# EAGLE board Main (EAGLE 7.2.0)
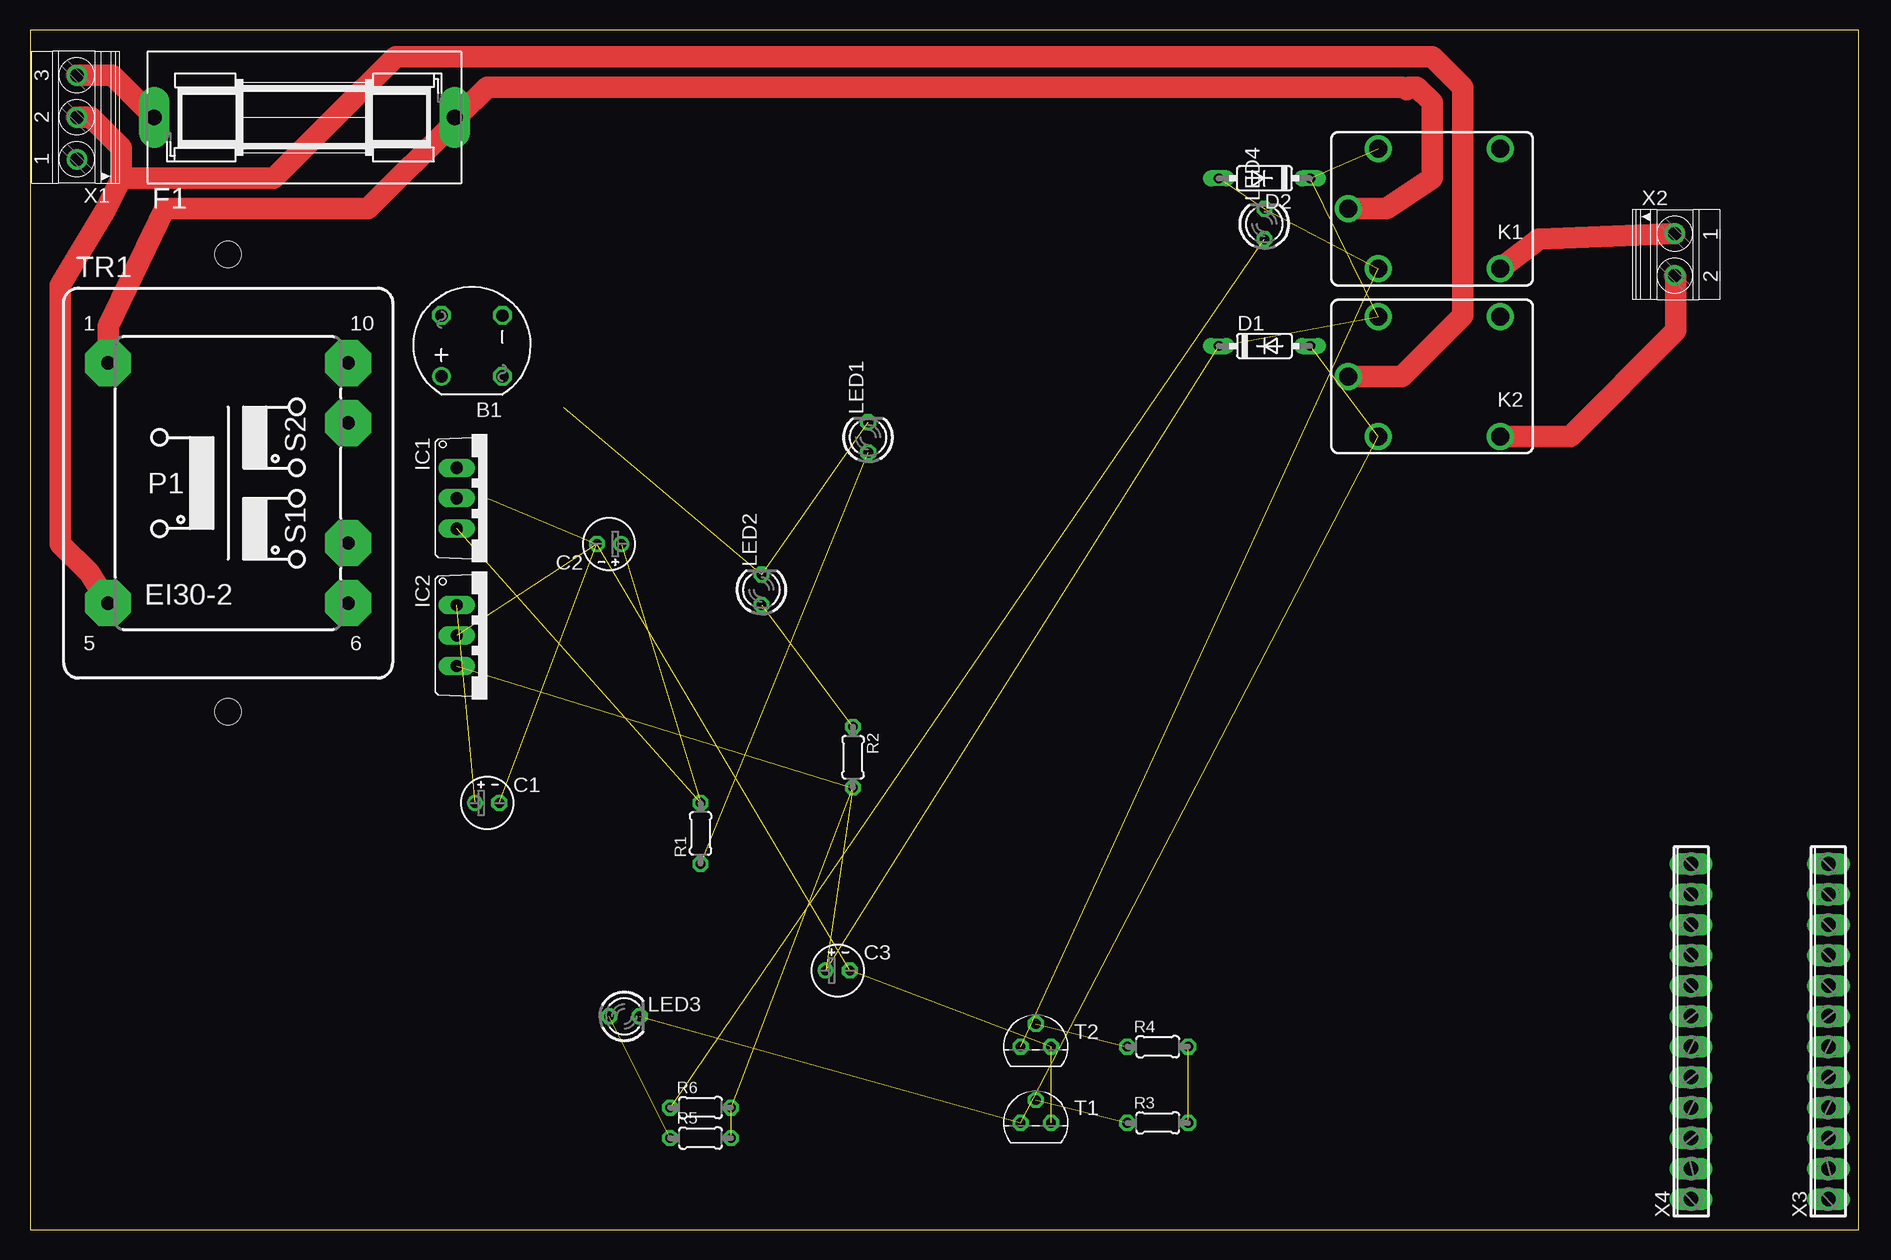
[diagram p0: board, top side]
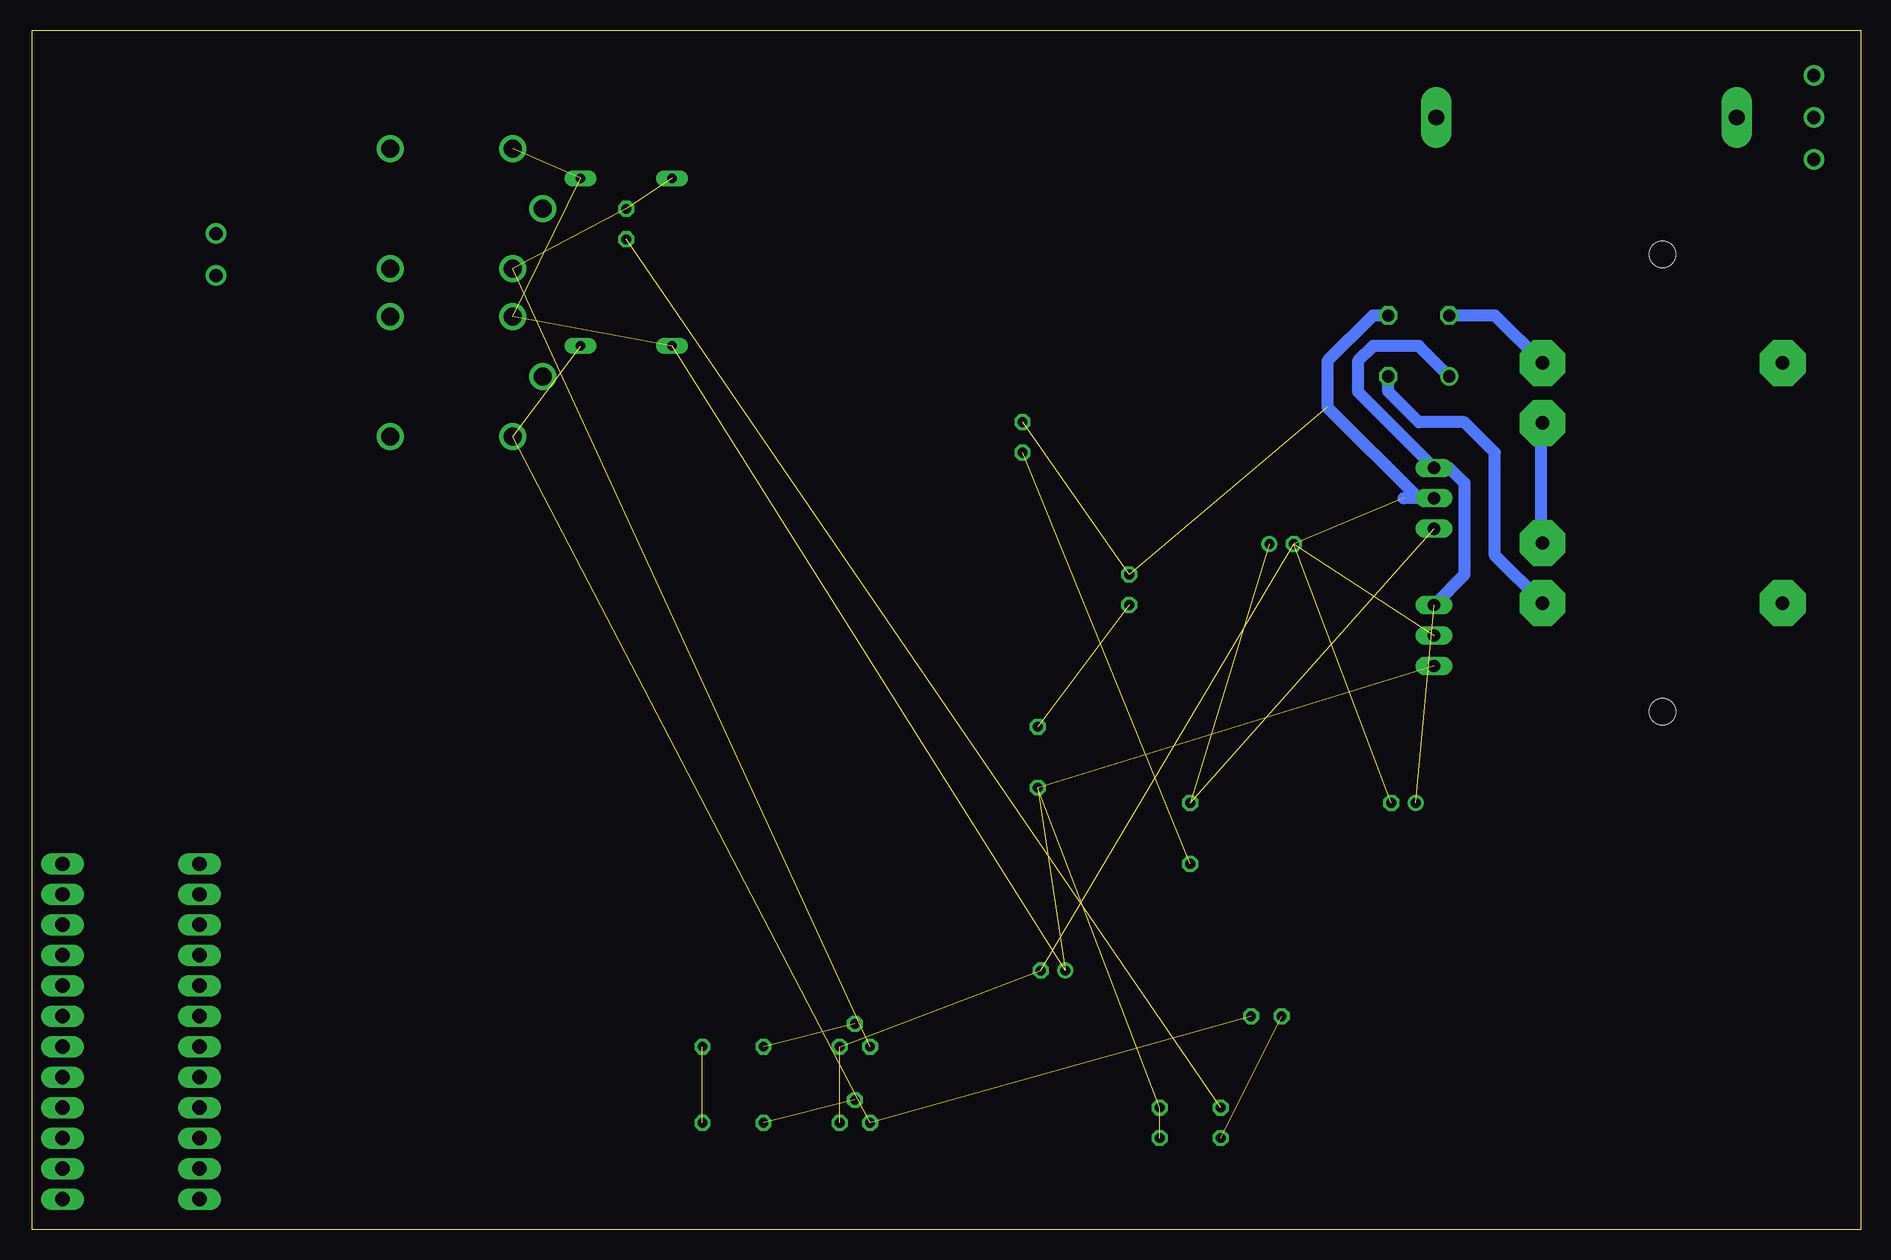
[diagram p1: board, bottom side, seen from below]

Size 152.38 x 100 mm. Coordinates in mm from the lower left corner, seen from the top.
Outline: 0,0 152.38,0 152.38,100 0,100 0,0
Copper layers (1*16): Top 0.035mm / dielectric 1.5mm / Bottom 0.035mm
Design rules "default": minimum track width 10mil, minimum drill 24mil, track to track 8mil, track to pad 8mil, pad to pad 8mil, via to via 8mil, smd to smd 8mil, copper to edge 40mil, drill to drill 8mil, minimum pad ring 10mil, minimum via ring 8mil, stop-mask expansion 4mil, vias tented up to drill 0mil, thermal gap 10mil
Holes 2.2 mm at 16.51,81.28 16.51,43.18

## Footprints (pad centres in the part's own frame; a part is rotated, then mirrored left to right if it is on the bottom)
RB1A = drill 1.016: + -2.54,2.54 | drill 1.016 octagon: - 2.54,-2.54; AC1 2.54,2.54; AC2 -2.54,-2.54
E2-4 = drill 0.813 pad 1.27: + -1.016,0 | drill 0.813 pad 1.27 octagon: - 1.016,0
DO35-7 = drill 0.813 long: A 3.81,0; C -3.81,0
SH25 = drill 1.321 pad 2.54 long: 1 -12.522,0; 2 12.522,0
TO220V = drill 1.016 long: 1 -2.54,-2.54; 2 0,-2.54; 3 2.54,-2.54
CQ1 = drill 1.5: 1 4.5,-5; 2 4.5,5; C 7,0; NC -5.7,-5; NO -5.7,5
LED3MM = drill 0.813 octagon: A -1.27,0; K 1.27,0
0204/5 = drill 0.813 octagon: 1 -2.54,0; 2 2.54,0
TO92 = drill 0.813 octagon: 1 1.27,0; 2 0,1.905; 3 -1.27,0
EI30-2 = drill 1.118 pad 3.81 octagon: 1 -10.008,10.008; 5 -10.008,-10.008; 6 10.008,-10.008; 7 10.008,-5.004; 9 10.008,5.004; 10 10.008,10.008
1751251 = drill 1.1 pad 1.7: 1 -3.5,-0.1; 2 0,-0.1; 3 3.5,-0.1
1751248 = drill 1.1 pad 1.7: 1 -1.75,-0.1; 2 1.75,-0.1
12POL254 = drill 1.2 long: 1 -13.97,0; 2 -11.43,0; 3 -8.89,0; 4 -6.35,0; 5 -3.81,0; 6 -1.27,0; 7 1.27,0; 8 3.81,0; 9 6.35,0; 10 8.89,0; 11 11.43,0; 12 13.97,0

## Placement (x,y rotation side)
B1  [RB1A]  36.83,73.66 90 top
C1  22uf  [E2-4]  38.1,35.56 0 top
C2  22uf  [E2-4]  48.26,57.15 180 top
C3  22uf  [E2-4]  67.31,21.59 0 top
D1  1N4148DO35-7  [DO35-7]  102.87,73.66 0 top
D2  1N4148DO35-7  [DO35-7]  102.87,87.63 180 top
F1  [SH25]  22.86,92.71 0 top
IC1  7805TV  [TO220V]  38.1,60.96 270 top
IC2  7812TV  [TO220V]  38.1,49.53 270 top
K1  CQ1-12V  [CQ1]  116.84,85.09 180 top
K2  CQ1-12V  [CQ1]  116.84,71.12 180 top
LED1  TLLG4400  [LED3MM]  69.85,66.04 90 top
LED2  TLLG4400  [LED3MM]  60.96,53.34 90 top
LED3  TLLG4400  [LED3MM]  49.53,17.78 0 top
LED4  TLLG4400  [LED3MM]  102.87,83.82 90 top
R1  1  [0204/5]  55.88,33.02 90 top
R2  1  [0204/5]  68.58,39.37 270 top
R3  1  [0204/5]  93.98,8.89 0 top
R4  1  [0204/5]  93.98,15.24 0 top
R5  1  [0204/5]  55.88,7.62 0 top
R6  1  [0204/5]  55.88,10.16 0 top
T1  BC547  [TO92]  83.82,8.89 0 top
T2  BC547  [TO92]  83.82,15.24 0 top
TR1  [EI30-2]  16.51,62.23 0 top
X1  1751251  [1751251]  3.81,92.71 90 top
X2  1751248  [1751248]  137.16,81.28 270 top
X3  [12POL254]  149.86,16.51 90 top
X4  [12POL254]  138.43,16.51 90 top

## Library data of the parts
B1 = rectifier
C1-C3 R1-R6 = rcl
D1 D2 = diode
F1 = fuse; MF: SCHURTER; MPN: 0031.8211; OC_FARNELL: 1162741; OC_NEWARK: 96B9380
IC1 IC2 = linear
K1 K2 = relay; OC_FARNELL: unknown; OC_NEWARK: unknown
LED1-LED4 = led; MF: VISHAY SEMICONDUCTOR; OC_FARNELL: 1612435
T1 T2 = transistor
TR1 = trafo
X1 X2 = con-phoenix-350; OC_FARNELL: unknown; OC_NEWARK: unknown
X3 X4 = con-phoenix-254; OC_FARNELL: unknown; OC_NEWARK: unknown

## Nets
+5V: C2.+ IC1.3 R1.2
+12V: C3.+ D1.C D2.C IC2.3 K1.1 K2.1 R2.2 R5.2 R6.2
GND: B1.- C1.- C2.- C3.- IC1.2 IC2.2 LED1.K LED2.K T1.1 T2.1
N$1: F1.2 K1.C TR1.1
N$2: K2.C TR1.5 X1.2
N$3: K1.NO X2.1
N$4: K2.NO X2.2
N$5: TR1.7 TR1.9
N$6: B1.AC1 TR1.10
N$7: B1.AC2 TR1.6
N$8: B1.+ C1.+ IC1.1 IC2.1
N$9: D1.A K2.2 LED3.K T1.3
N$10: LED2.A R2.1
N$11: LED3.A R5.1
N$12: D2.A K1.2 LED4.K T2.3
N$13: LED1.A R1.1
N$14: R3.1 T1.2
N$15: R4.1 T2.2
N$16: R3.2 R4.2
N$17: F1.1 X1.3
N$18: LED4.A R6.1

## Tracks (layer width: path | path; a pad name or v marks a point on that pad's centre or on a via)
+5V  (2 unrouted)
+12V  (8 unrouted)
GND  (8 unrouted)
  Bottom 1.016: B1.- 40.64,76.2 44.45,72.39 44.45,68.58 36.83,60.96 IC1.2 38.1,60.96
N$1
  Top 1.778: 35.56,92.53 35.56,92.5 28.16,85.09 11.21,85.09 6.5,75.3 TR1.1 | 35.56,92.53 F1.2 35.56,92.71 | 35.56,92.53 35.56,92.71 | K1.C 113.03,85.09 116.84,87.63 116.84,93.98 115.57,95.25 114.95,95.25 114.73,95.03 114.3,95.25 38.1,95.25 35.56,92.71
N$2
  Top 1.778: X1.2 5.08,92.71 7.62,90.17 7.62,87.63 | K2.C 114.3,71.12 119.38,76.2 119.38,95.25 116.84,97.79 30.48,97.79 25.4,92.71 20.32,87.63 7.62,87.63 | 7.62,87.63 6.35,85.09 2.54,78.74 2.54,57.15 4.93,54.76 TR1.5
N$3
  Top 1.778: K1.NO 125.73,82.55 X2.1
N$4
  Top 1.778: X2.2 137.16,79.43 137.16,74.93 128.35,66.12 K2.NO
N$5
  Bottom 1.016: TR1.9 26.67,67.08 26.67,57.15 26.59,57.23 TR1.7
N$6
  Bottom 1.016: TR1.10 30.48,76.2 B1.AC1
N$7
  Bottom 1.016: TR1.6 30.48,56.19 30.48,64.77 33.02,67.31 36.83,67.31 39.37,69.85 B1.AC2
N$8  (1 unrouted)
  Bottom 1.016: B1.+ 36.83,73.66 40.64,73.66 41.91,72.39 41.91,69.85 IC1.1 34.29,63.5 33.02,62.23 33.02,54.61 IC2.1
N$9  (3 unrouted)
N$10  (1 unrouted)
N$11  (1 unrouted)
N$12  (3 unrouted)
N$13  (1 unrouted)
N$14  (1 unrouted)
N$15  (1 unrouted)
N$16  (1 unrouted)
N$17
  Top 1.778: X1.3 6.84,96.21 F1.1
N$18  (1 unrouted)